# EAGLE board RobotArm5 (EAGLE 4.16)
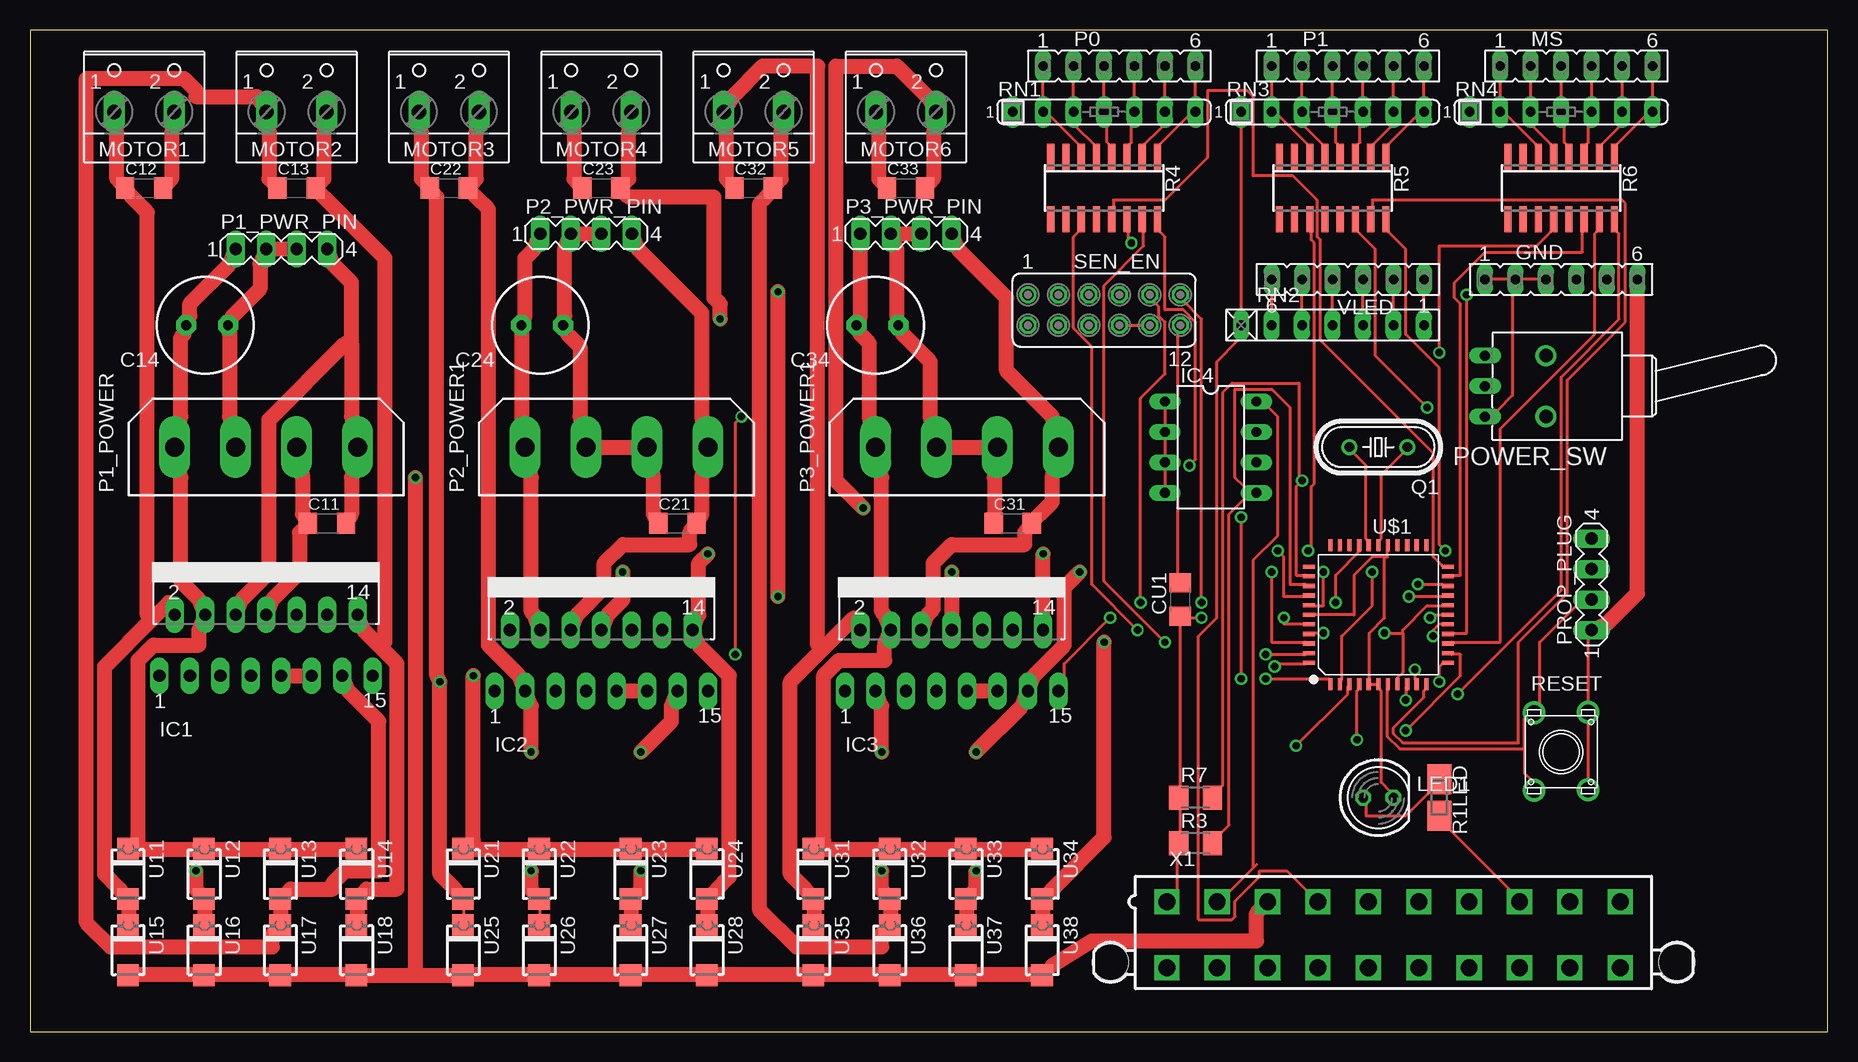
[diagram p0: board, top side]
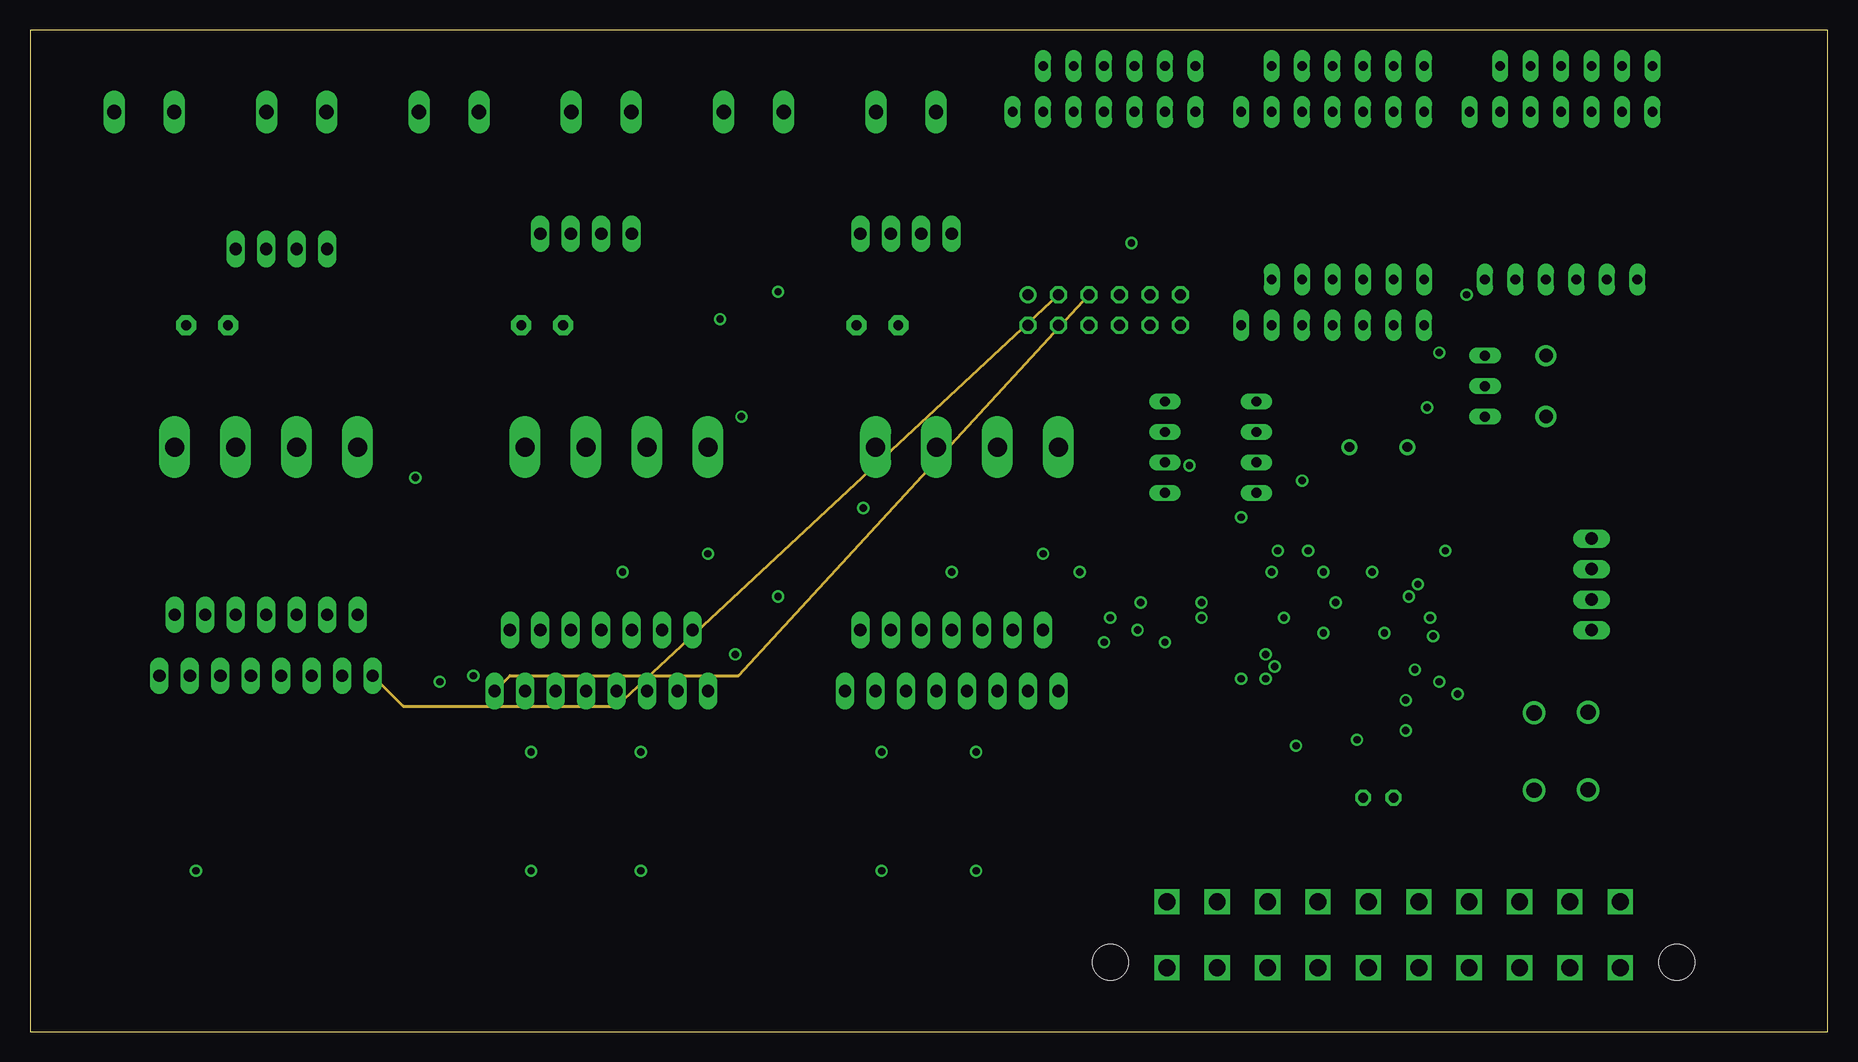
[diagram p1: board, inner layer Route2]
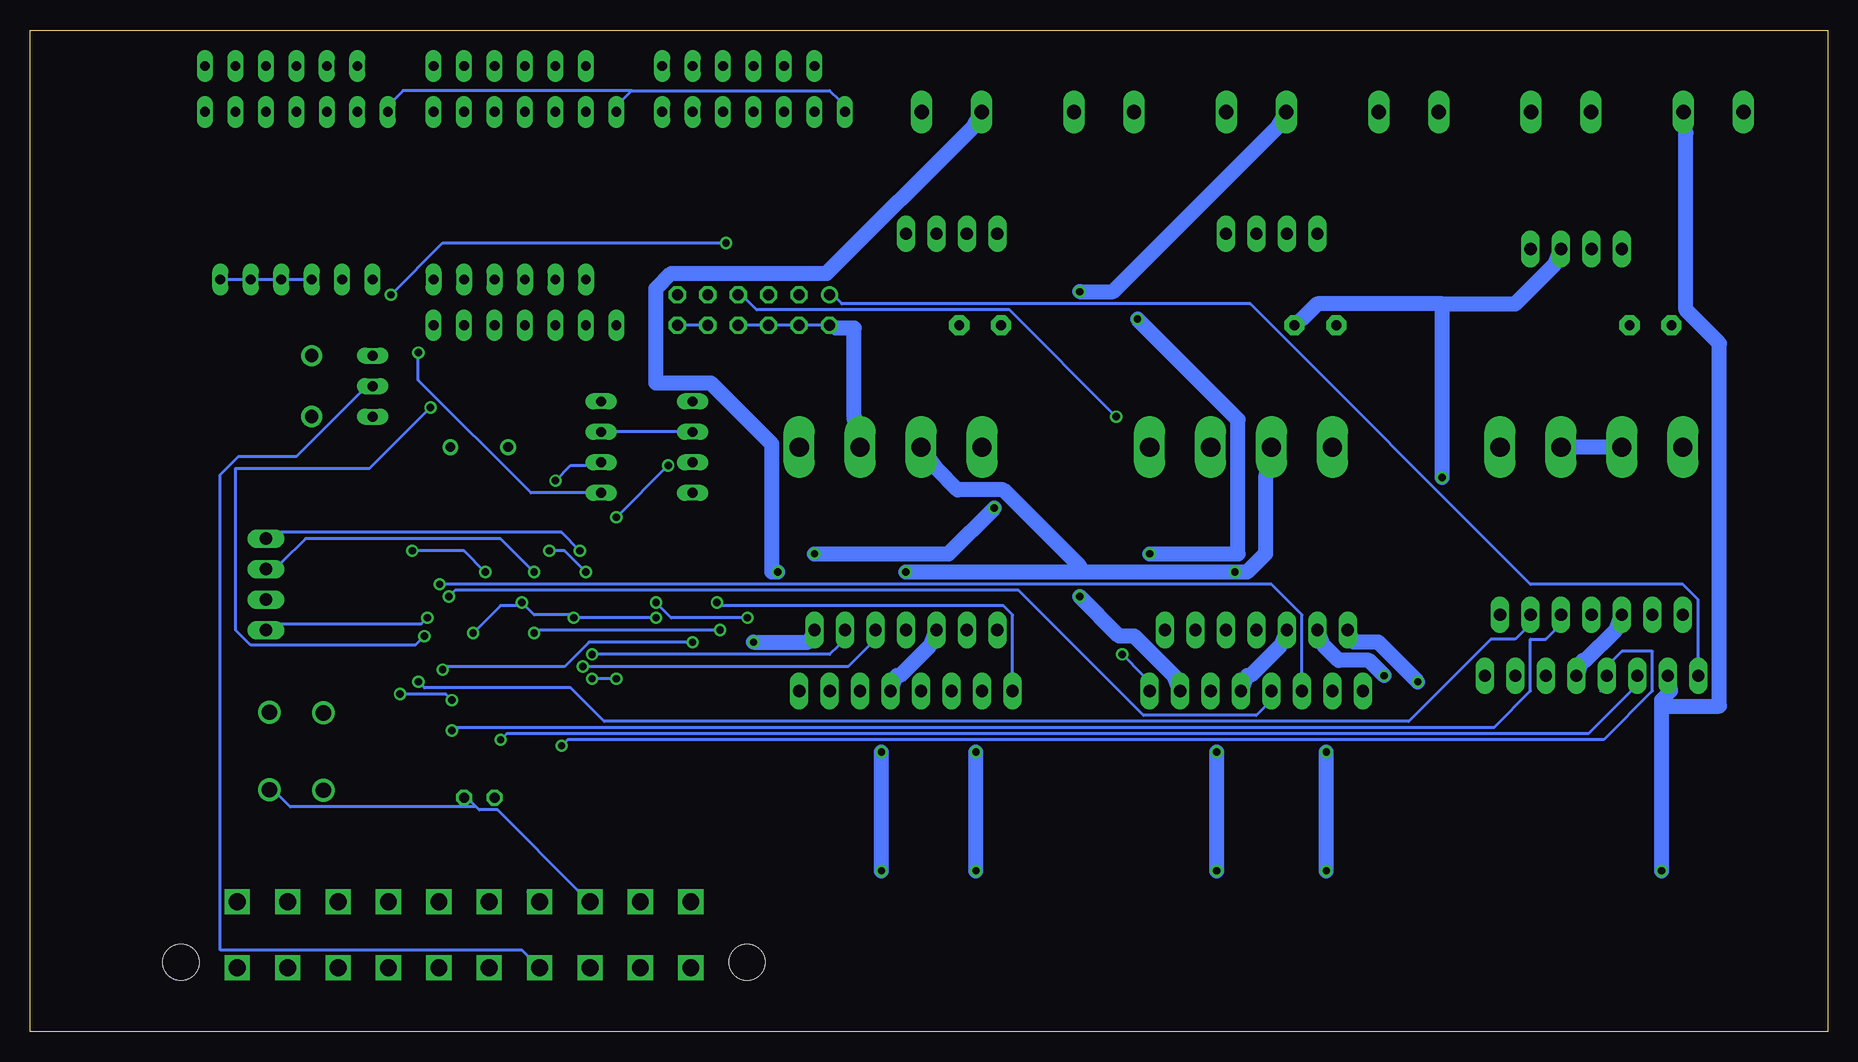
[diagram p2: board, bottom side, seen from below]

Size 149.84 x 83.49 mm. Coordinates in mm from the lower left corner, seen from the top.
Outline: 0,0 149.84,0 149.84,83.49 0,83.49 0,0
Copper layers (1*16): Top 0.035mm / dielectric 1.5mm / Bottom 0.035mm
Design rules "default": minimum track width 50mil, minimum drill 24mil, track to track 8mil, track to pad 8mil, pad to pad 8mil, via to via 8mil, smd to smd 8mil, copper to edge 40mil, drill to drill 8mil, minimum pad ring 10mil, minimum via ring 8mil, stop-mask expansion 4mil, vias tented up to drill 0mil, thermal gap 10mil

## Footprints (pad centres in the part's own frame; a part is rotated, then mirrored left to right if it is on the bottom)
1206 = smd 1.524 x 1.778: P$1 -1.587,0; P$2 1.587,0
ENP-035-080 = drill 0.813 pad 1.676 octagon: 1 -1.905,0; 2 1.587,0
C1206 = smd 1.6 x 1.8: 1 -1.4,0; 2 1.4,0
FE06 = drill 0.813 long: 1 -6.35,0; 2 -3.81,0; 3 -1.27,0; 4 1.27,0; 5 3.81,0; 6 6.35,0
MULTIWATT-15 = drill 1.016 long: 1 -8.89,-7.62; 2 -7.62,-2.54; 3 -6.35,-7.62; 4 -5.08,-2.54; 5 -3.81,-7.62; 6 -2.54,-2.54; 7 -1.27,-7.62; 8 0,-2.54; 9 1.27,-7.62; 10 2.54,-2.54; 11 3.81,-7.62; 12 5.08,-2.54; 13 6.35,-7.62; 14 7.62,-2.54; 15 8.89,-7.62
DIL08 = drill 0.813 long: 1 -3.81,-3.81; 2 -1.27,-3.81; 3 1.27,-3.81; 4 3.81,-3.81; 5 3.81,3.81; 6 1.27,3.81; 7 -1.27,3.81; 8 -3.81,3.81
LED5MM = drill 0.813 octagon: A -1.27,0; K 1.27,0
W237-102 = drill 1.194 long: 1 -2.5,-1.27; 2 2.5,-1.27
9090-4V = drill 1.6 pad 2.6 long: 1 -7.62,0; 2 -2.54,0; 3 2.54,0; 4 7.62,0
MA04-1 = drill 1.016 long: 1 -3.81,0; 2 -1.27,0; 3 1.27,0; 4 3.81,0
9070-1W = drill 0.813 long: 1 5.08,-2.54; 2 5.08,0; 3 5.08,2.54 | drill 1.118 pad 1.778 round: B 0,-2.54; B1 0,2.54
HC49/S = drill 0.813 round: 1 -2.413,0; 2 2.413,0
SMK = smd 2.5 x 2: 1 1.524,0; 2 -1.524,0
M1206 = smd 1.6 x 2: 1 -1.4,0; 2 1.4,0
SO16 = smd 0.6 x 2.2: 1 -4.445,-2.6; 2 -3.175,-2.6; 3 -1.905,-2.6; 4 -0.635,-2.6; 5 0.635,-2.6; 6 1.905,-2.6; 7 3.175,-2.6; 8 4.445,-2.6; 9 4.445,2.6; 10 3.175,2.6; 11 1.905,2.6; 12 0.635,2.6; 13 -0.635,2.6; 14 -1.905,2.6; 15 -3.175,2.6; 16 -4.445,2.6
FSMCD = drill 1.27 round: P$1 -2.25,3.25; P$2 -2.25,-3.2; P$3 2.25,3.3; P$4 2.25,-3.15
SIL7 = drill 0.813 long: 1 -7.62,0; 2 -5.08,0; 3 -2.54,0; 4 0,0; 5 2.54,0; 6 5.08,0; 7 7.62,0
RN-7 = drill 0.813 long: 1 -7.62,0; 2 -5.08,0; 3 -2.54,0; 4 0,0; 5 2.54,0; 6 5.08,0; 7 7.62,0
FE06-2 = drill 0.914 round: 1 -6.35,1.27 | drill 0.914 octagon: 2 -6.35,-1.27; 3 -3.81,1.27; 4 -3.81,-1.27; 5 -1.27,1.27; 6 -1.27,-1.27; 7 1.27,1.27; 8 1.27,-1.27; 9 3.81,1.27; 10 3.81,-1.27; 11 6.35,1.27; 12 6.35,-1.27
SMA = smd 1.8 x 1.8: 1 -2.1,-0.1; 2 2.1,-0.1
LQFP-44 = smd 0.35 x 1: 1 -4,-5.8; 2 -3.2,-5.8; 3 -2.4,-5.8; 4 -1.6,-5.8; 5 -0.8,-5.8; 6 0,-5.8; 7 0.8,-5.8; 8 1.6,-5.8; 9 2.4,-5.8; 10 3.2,-5.8; 11 4,-5.8; 23 4,5.8; 24 3.2,5.8; 25 2.4,5.8; 26 1.6,5.8; 27 0.8,5.8; 28 0,5.8; 29 -0.8,5.8; 30 -1.6,5.8; 31 -2.4,5.8; 32 -3.2,5.8; 33 -4,5.8 | smd 1 x 0.35: 12 5.8,-4; 13 5.8,-3.2; 14 5.8,-2.4; 15 5.8,-1.6; 16 5.8,-0.8; 17 5.8,0; 18 5.8,0.8; 19 5.8,1.6; 20 5.8,2.4; 21 5.8,3.2; 22 5.8,4; 34 -5.8,4; 35 -5.8,3.2; 36 -5.8,2.4; 37 -5.8,1.6; 38 -5.8,0.8; 39 -5.8,0; 40 -5.8,-0.8; 41 -5.8,-1.6; 42 -5.8,-2.4; 43 -5.8,-3.2; 44 -5.8,-4
5566-20 = drill 1.4 square: 1 18.9,-2.75; 2 14.7,-2.75; 3 10.5,-2.75; 4 6.3,-2.75; 5 2.1,-2.75; 6 -2.1,-2.75; 7 -6.3,-2.75; 8 -10.5,-2.75; 9 -14.7,-2.75; 10 -18.9,-2.75; 11 18.9,2.75; 12 14.7,2.75; 13 10.5,2.75; 14 6.3,2.75; 15 2.1,2.75; 16 -2.1,2.75; 17 -6.3,2.75; 18 -10.5,2.75; 19 -14.7,2.75; 20 -18.9,2.75 | hole 3: 23.6,2.29; -23.6,2.29

## Placement (x,y rotation side)
C11  .1uf  [1206]  24.76,42.38 0 top
C12  .1uf  [1206]  9.52,70.32 0 top
C13  .1uf  [1206]  22.22,70.32 0 top
C14  1000uf  [ENP-035-080]  14.6,58.89 180 top
C21  .1uf  [1206]  53.97,42.38 0 top
C22  .1uf  [1206]  34.92,70.32 0 top
C23  .1uf  [1206]  47.62,70.32 0 top
C24  1000uf  [ENP-035-080]  42.54,58.89 180 top
C31  .1uf  [1206]  81.91,42.38 0 top
C32  .1uf  [1206]  60.32,70.32 0 top
C33  .1uf  [1206]  73.02,70.32 0 top
C34  1000uf  [ENP-035-080]  70.48,58.89 180 top
CU1  1uf  [C1206]  95.88,36.03 90 top
GND  [FE06]  127.63,62.7 0 top
IC1  L298  [MULTIWATT-15]  19.68,37.3 0 top
IC2  L298  [MULTIWATT-15]  47.62,36.03 0 top
IC3  L298  [MULTIWATT-15]  76.83,36.03 0 top
IC4  AT24CP  [DIL08]  98.42,48.73 270 top
LED1  [LED5MM]  112.39,19.52 0 top
MOTOR1  [W237-102]  9.52,77.94 0 top
MOTOR2  [W237-102]  22.22,77.94 0 top
MOTOR3  [W237-102]  34.92,77.94 0 top
MOTOR4  [W237-102]  47.62,77.94 0 top
MOTOR5  [W237-102]  60.32,77.94 0 top
MOTOR6  [W237-102]  73.02,77.94 0 top
MS  [FE06]  128.9,80.48 0 top
P0  [FE06]  90.8,80.48 0 top
P1  [FE06]  109.85,80.48 0 top
P1_POWER  9090-4V  [9090-4V]  19.68,48.73 0 top
P1_PWR_PIN  [MA04-1]  20.95,65.24 0 top
P2_POWER1  9090-4V  [9090-4V]  48.89,48.73 0 top
P2_PWR_PIN  [MA04-1]  46.35,66.51 0 top
P3_POWER1  9090-4V  [9090-4V]  78.1,48.73 0 top
P3_PWR_PIN  [MA04-1]  73.02,66.51 0 top
POWER_SW  [9070-1W]  126.36,53.81 180 top
PROP_PLUG  [MA04-1]  130.17,37.3 90 top
Q1  [HC49/S]  112.39,48.73 180 top
R1LED  330ohm  [SMK]  117.47,19.52 270 top
R3  10K  [M1206]  97.15,15.71 0 top
R4  270ohm  [SO16]  89.53,70.32 180 top
R5  270ohm  [SO16]  108.58,70.32 180 top
R6  270ohm  [SO16]  127.63,70.32 180 top
R7  10K  [M1206]  97.15,19.52 0 top
RESET  FSMCD  [FSMCD]  127.63,23.33 0 top
RN1  10K  [SIL7]  89.53,76.67 0 top
RN2  [RN-7]  108.58,58.89 0 top
RN3  10K  [SIL7]  108.58,76.67 0 top
RN4  10K  [SIL7]  127.63,76.67 0 top
SEN_EN  [FE06-2]  89.53,60.16 0 top
U11  SSA34  [SMA]  8.25,13.17 270 top
U12  SSA34  [SMA]  14.6,13.17 270 top
U13  SSA34  [SMA]  20.95,13.17 270 top
U14  SSA34  [SMA]  27.3,13.17 270 top
U15  SSA34  [SMA]  8.25,6.82 270 top
U16  SSA34  [SMA]  14.6,6.82 270 top
U17  SSA34  [SMA]  20.95,6.82 270 top
U18  SSA34  [SMA]  27.3,6.82 270 top
U21  SSA34  [SMA]  36.19,13.17 270 top
U22  SSA34  [SMA]  42.54,13.17 270 top
U23  SSA34  [SMA]  50.16,13.17 270 top
U24  SSA34  [SMA]  56.51,13.17 270 top
U25  SSA34  [SMA]  36.19,6.82 270 top
U26  SSA34  [SMA]  42.54,6.82 270 top
U27  SSA34  [SMA]  50.16,6.82 270 top
U28  SSA34  [SMA]  56.51,6.82 270 top
U31  SSA34  [SMA]  65.4,13.17 270 top
U32  SSA34  [SMA]  71.75,13.17 270 top
U33  SSA34  [SMA]  78.1,13.17 270 top
U34  SSA34  [SMA]  84.45,13.17 270 top
U35  SSA34  [SMA]  65.4,6.82 270 top
U36  SSA34  [SMA]  71.75,6.82 270 top
U37  SSA34  [SMA]  78.1,6.82 270 top
U38  SSA34  [SMA]  84.45,6.82 270 top
U$1  P8X32A  [LQFP-44]  112.39,34.76 0 top
VLED  [FE06]  109.85,62.7 180 top
X1  5566-20  [5566-20]  113.66,8.09 180 top

## Library data of the parts
C11-C14 C21-C24 C31-C34 = zz-cap-master
CU1 = zz-rcl
GND MS P0 P1 SEN_EN VLED = con-lsta
IC1-IC3 = zz-st-microelectronics
IC4 = atmel
LED1 = led
MOTOR1-MOTOR6 = con-wago-500
P1_POWER P2_POWER1 P3_POWER1 = con-thomas-betts
P1_PWR_PIN P2_PWR_PIN P3_PWR_PIN PROP_PLUG = con-lstb
POWER_SW = switch
Q1 = crystal
R1LED = resistor-shunt
R3 R7 = rcl
R4-R6 = resistor-bourns
RESET = zz-switch-misc
RN1 RN3 RN4 = resistor-sil
RN2 = resistor-net
U11-U18 U21-U28 U31-U38 = diode-20CJQ030
U$1 = propeller
X1 = con-molex

## Nets
3.3VCC1: CU1.1 R3.1 R7.1 U$1.8 U$1.18 U$1.30 U$1.40 X1.1
5VCC: RN1.1 RN2.1 RN3.1 RN4.1 X1.4
CTL1: IC1.7 U$1.3
CTL2: IC1.12 U$1.12
CTL3: IC2.7 U$1.19
CTL4: IC2.12
CTL5: IC3.7
CTL6: IC3.12 U$1.43
GND: C11.P$1 C14.1 C21.P$1 C24.1 C31.P$1 C34.1 CU1.2 GND.1 GND.2 GND.3 GND.4 GND.5 GND.6 IC1.8 IC2.8 IC3.8 IC4.1 IC4.2 IC4.3 IC4.4 IC4.7 LED1.K P1_POWER.2 P1_POWER.3 P1_PWR_PIN.2 P1_PWR_PIN.3 P2_POWER1.2 P2_POWER1.3 P2_PWR_PIN.2 P2_PWR_PIN.3 P3_POWER1.2 P3_POWER1.3 P3_PWR_PIN.2 P3_PWR_PIN.3 POWER_SW.3 PROP_PLUG.1 RESET.P$3 RESET.P$4 SEN_EN.2 SEN_EN.4 SEN_EN.6 SEN_EN.8 SEN_EN.10 SEN_EN.12 U15.2 U16.2 U17.2 U18.2 U25.2 U26.2 U27.2 U28.2 U35.2 U36.2 U37.2 U38.2 U$1.5 U$1.6 U$1.17 U$1.27 U$1.39 X1.3
M5GND: C13.P$2 IC1.14 MOTOR2.2 U14.2 U18.1
M5GND1: C23.P$2 IC2.14 MOTOR4.2 U24.2 U28.1
M5GND2: C33.P$2 IC3.14 MOTOR6.2 U34.2 U38.1
M5VCC: C13.P$1 IC1.13 MOTOR2.1 U13.2 U17.1
M5VCC1: C23.P$1 IC2.13 MOTOR4.1 U23.2 U27.1
M5VCC2: C33.P$1 IC3.13 MOTOR6.1 U33.2 U37.1
M6GND: C12.P$2 IC1.3 MOTOR1.2 U12.2 U16.1
M6GND1: C22.P$2 IC2.3 MOTOR3.2 U22.2 U26.1
M6GND2: C32.P$2 IC3.3 MOTOR5.2 U32.2 U36.1
M6VCC: C12.P$1 IC1.2 MOTOR1.1 U11.2 U15.1
M6VCC1: C22.P$1 IC2.2 MOTOR3.1 U21.2 U25.1
M6VCC2: C32.P$1 IC3.2 MOTOR5.1 U31.2 U35.1
N$1: RN2.2 VLED.6
N$2: RN2.3 VLED.5
N$3: POWER_SW.2 X1.14
N$4: R1LED.1 X1.8
N$5: RN2.4 VLED.4
N$6: LED1.A R1LED.2
N$7: P1.1 R5.6 RN3.2
N$8: RN2.5 VLED.3
N$9: RN2.6 VLED.2
N$10: RN2.7 VLED.1
N$11: P1.2 R5.5 RN3.3
N$12: P0.3 R4.4 RN1.4
N$13: Q1.2 U$1.29
N$14: Q1.1 U$1.28
N$15: P0.4 R4.3 RN1.5
N$16: P0.5 R4.2 RN1.6
N$17: P0.6 R4.1 RN1.7
N$18: P1.3 R5.4 RN3.4
N$19: P1.4 R5.3 RN3.5
N$20: P1.5 R5.2 RN3.6
N$21: P1.6 R5.1 RN3.7
N$22: MS.6 R6.1 RN4.7
N$23: MS.5 R6.2 RN4.6
N$24: MS.4 R6.3 RN4.5
N$25: MS.3 R6.4 RN4.4
N$26: MS.2 R6.5 RN4.3
N$27: MS.1 R6.6 RN4.2
NC1: R6.11
P0: R4.11 U$1.41
P0_1: P0.1 R4.6 RN1.2
P0_2: P0.2 R4.5 RN1.3
P1: R5.11 U$1.42
P1_5V: C11.P$2 IC1.6 IC1.9 IC1.11 P1_POWER.4 P1_PWR_PIN.4
P1_12V: C14.2 IC1.4 P1_POWER.1 P1_PWR_PIN.1 U11.1 U12.1 U13.1 U14.1
P2_5V: C21.P$2 IC2.6 IC2.9 IC2.11 P2_POWER1.4 P2_PWR_PIN.4
P2_12V: C24.2 IC2.4 P2_POWER1.1 P2_PWR_PIN.1 U21.1 U22.1 U23.1 U24.1
P3_5V: C31.P$2 IC3.6 IC3.9 IC3.11 P3_POWER1.4 P3_PWR_PIN.4
P3_12V: C34.2 IC3.4 P3_POWER1.1 P3_PWR_PIN.1 U31.1 U32.1 U33.1 U34.1
P4: R4.16 U$1.1
P5: R5.16 U$1.2
P8: R6.16 U$1.9
P9: R4.15 U$1.10
P10: R5.15 U$1.11
P13: R6.15 U$1.14
P14: R4.14 U$1.15
P15: R5.14 U$1.16
P18: R6.14 U$1.21
P19: R4.13 U$1.22
P20: R5.13
P23: R6.13
P24: R4.12
P25: R5.12
P28: IC4.6 R7.2 U$1.35
P29: IC4.5 R3.2 R6.12 U$1.36
P30: PROP_PLUG.4 U$1.37
P31: PROP_PLUG.3 U$1.38
PWM1: IC1.5 U$1.4
PWM2: IC1.10 U$1.13
PWM3: IC2.5 U$1.20
PWM4: IC2.10
PWM5: IC3.5
PWM6: IC3.10 U$1.44
RES: PROP_PLUG.2 RESET.P$1 RESET.P$2 U$1.7
SEN_1: IC1.1 SEN_EN.1
SEN_2: IC1.15 SEN_EN.3
SEN_3: IC2.1 SEN_EN.5
SEN_4: IC2.15 SEN_EN.7
SEN_5: IC3.1 SEN_EN.9
SEN_6: IC3.15 SEN_EN.11
VCC3.3V2: IC4.8 X1.2

## Tracks (layer width: path | path; a pad name or v marks a point on that pad's centre or on a via)
3.3VCC1  (via drill 0.61)
  Top 0.254: X1.1 95.63,11.65 95.63,14.95 R3.1 95.88,16.47 95.88,18.76 R7.1 95.88,20.28 CU1.1 96.64,34.51 v97.66,34.51 | 114.42,33.24 114.42,33.49 116.45,35.52 117.72,35.52 U$1.18 | 114.42,33.24 114.42,29.93 113.91,29.43 U$1.8 | v104.52,34.51 104.52,34 106.29,34 U$1.40 | v108.83,35.78 108.83,38.06 110.87,40.09 U$1.30 | v112.9,33.24 114.42,33.24
  Bottom 0.254: v97.66,34.51 v104.52,34.51 104.77,34.76 107.82,34.76 v108.83,35.78 109.09,35.52 110.61,35.52 v112.9,33.24
5VCC
  Top 0.254: RN3.1 RN2.1 100.71,57.62 98.93,55.84 98.93,34.51 97.4,32.98 97.4,9.36 100.2,9.36 100.45,9.61 100.45,10.88 102.48,12.92 102.48,13.42 104.77,13.42 106.55,11.65 X1.4
  Bottom 0.254: 99.69,78.45 83.18,78.45 82.42,77.69 RN1.1 | 99.69,78.45 100.45,77.69 RN3.1 | 99.69,78.45 118.74,78.45 119.5,77.69 RN4.1 | X1.4 108.33,11.65
CTL1  (via drill 0.61)
  Top 0.254: v105.53,23.84 109.85,28.16 109.85,28.66 U$1.3
  Bottom 0.254: 18.92,28.41 IC1.7 17.9,30.95 17.14,31.71 14.6,31.71 14.6,28.41 18.66,24.35 105.02,24.35 v105.53,23.84
CTL2  (via drill 0.61)
  Top 0.254: v117.47,29.17 117.47,30.44 117.72,30.7 U$1.12
  Bottom 0.254: v117.47,29.17 116.96,28.66 104.77,28.66 101.98,25.87 34.92,25.87 28.06,32.73 26.03,32.73 25.27,33.49 IC1.12
CTL3  (via drill 0.61)
  Top 0.254: v114.93,36.28 117.72,36.28 U$1.19
  Bottom 0.254: v114.93,36.28 114.42,36.79 67.43,36.79 57.02,26.38 47.62,26.38 46.86,27.14 IC2.7
CTL6  (via drill 0.61)
  Top 0.254: v102.99,31.46 106.29,31.46 U$1.43
  Bottom 0.254: v102.99,31.46 83.18,31.46 82.42,32.22 IC3.12
GND  (via drill 0.61)
  Top 0.254: U35.2 66.16,4.79 | 70.99,4.79 U36.2 72.51,4.79 | 78.86,4.79 U37.2 77.34,4.79 | 83.69,4.79 U38.2 85.21,5.55 | U25.2 36.95,4.79 | 41.78,4.79 U26.2 43.3,4.79 | 50.92,4.79 U27.2 49.4,4.79 | 55.75,4.79 U28.2 | X1.3 104.01,11.65 | U15.2 9.01,4.79 | 13.84,4.79 U16.2 15.36,4.79 | 21.71,4.79 U17.2 20.19,4.79 | 26.54,4.79 U18.2 26.54,5.55 | GND.2 GND.1 | GND.3 GND.2 | CU1.2 95.63,38.06 95.63,44.41 IC4.4 IC4.3 IC4.2 IC4.1 95.63,53.05 95.63,58.38 SEN_EN.12 | SEN_EN.8 SEN_EN.10 | RESET.P$4 129.92,21.04 129.92,25.87 RESET.P$3 129.92,27.39 129.92,32.98 PROP_PLUG.1 | v116.71,34.51 116.71,34.76 U$1.17 | POWER_SW.3 122.3,51.78 123.57,53.05 123.57,61.43 GND.2 | 112.9,39.59 113.15,39.59 113.15,40.09 U$1.27 | 112.9,39.59 111.88,39.59 110.36,38.06 110.36,34.76 U$1.39 | LED1.K 113.41,20.03 112.64,20.79 112.64,28.41 112.39,28.66 U$1.6 112.39,28.92 111.63,28.92 U$1.5 111.63,29.43 111.63,33.24 112.9,34.51 112.9,39.59
  Top 0.406: U25.2 36.19,4.72 36.19,4.28
  Top 1.27: 66.16,4.79 70.99,4.79 | 78.86,4.79 83.69,4.79 | 72.51,4.79 77.34,4.79 | 36.95,4.79 41.78,4.79 | 50.92,4.79 55.75,4.79 | 43.3,4.79 49.4,4.79 | 85.21,5.55 88.51,7.58 102.23,7.58 102.23,9.87 X1.3 | 9.01,4.79 13.84,4.79 | 21.71,4.79 26.54,4.79 | 15.36,4.79 20.19,4.79 | U18.2 32.13,4.72 | 32.13,4.72 36.19,4.72 | P1_PWR_PIN.3 P1_PWR_PIN.2 19.17,63.97 19.17,61.94 16.89,59.65 C14.1 16.63,58.13 16.63,51.27 P1_POWER.2 | P1_POWER.3 22.73,46.19 22.73,43.14 C11.P$1 22.47,41.62 22.47,38.32 20.19,36.03 IC1.8 | P3_PWR_PIN.3 P3_PWR_PIN.2 72.26,65.24 72.26,59.65 C34.1 72.77,58.13 75.05,55.84 75.05,51.27 P3_POWER1.2 P3_POWER1.3 80.39,46.19 80.39,43.14 C31.P$1 | P2_PWR_PIN.3 P2_PWR_PIN.2 44.57,65.24 44.57,59.65 C24.1 44.83,58.13 45.84,57.11 45.84,51.27 P2_POWER1.2 P2_POWER1.3 51.94,46.19 51.94,43.14 C21.P$1 | v49.4,38.32 49.4,36.03 48.13,34.76 IC2.8 | v76.83,38.32 IC3.8 | GND.6 133.98,36.54 131.44,34 PROP_PLUG.1 | U35.2 64.64,4.79 57.27,4.79 U28.2 | 32.13,4.72 v32.13,46.19
  Bottom 0.254: GND.6 GND.5 GND.4 GND.3 | IC4.2 IC4.7 | SEN_EN.10 SEN_EN.12 | SEN_EN.8 SEN_EN.6 SEN_EN.4 SEN_EN.2 | v116.71,34.51 117.22,34 128.9,34 PROP_PLUG.1 | 112.64,18.76 113.15,19.27 LED1.K | 112.64,18.76 112.39,18.5 110.87,18.5 104.01,11.65 X1.3 | 112.64,18.76 128.14,18.76 129.15,19.77 RESET.P$4
  Bottom 1.27: P1_POWER.2 P1_POWER.3 | P3_POWER1.3 81.15,51.27 81.15,58.64 82.67,58.64 SEN_EN.2 | P2_POWER1.2 46.86,46.19 46.86,39.84 48.38,38.32 v49.4,38.32 62.35,38.32 | 62.35,38.32 v76.83,38.32 | P3_POWER1.2 74.29,46.95 72.51,45.17 68.7,45.17 62.35,38.82 62.35,38.32 | 32.13,60.67 42.54,60.67 43.81,59.4 C24.1 | 32.13,60.67 26.03,60.67 22.73,63.97 P1_PWR_PIN.3 | v32.13,46.19 32.13,60.67
M5GND
  Top 0.254: U18.1 27.3,9.61 | 27.3,10.38 U14.2
  Top 1.27: 27.3,9.61 27.3,10.38 | MOTOR2.2 24.51,74.89 24.51,71.08 C13.P$2 24.51,69.56 29.59,64.48 29.59,32.47 29.2,32.09 | 29.2,32.09 27.81,33.49 IC1.14 | 29.2,32.09 30.6,30.7 30.6,11.9 28.06,11.9 U14.2
M5GND1  (via drill 0.61)
  Top 0.254: U28.1 56.51,9.61 | 56.51,10.38 U24.2
  Top 1.27: 56.51,9.61 56.51,10.38 | MOTOR4.2 49.91,74.89 49.91,71.08 C23.P$2 49.91,69.56 57.02,69.56 57.02,61.18 57.53,60.67 v57.53,59.4 | U24.2 57.27,11.9 58.29,12.92 58.29,29.68 55.75,32.22 IC2.14 55.75,34.76 55.75,39.08 v56.51,39.84
  Bottom 1.27: v57.53,59.4 49.14,51.02 49.14,39.84 v56.51,39.84
M5GND2  (via drill 0.61)
  Top 0.254: U38.1 84.45,9.61 | 84.45,10.38 U34.2
  Top 1.27: 84.45,9.61 84.45,10.38 | C33.P$2 75.31,71.08 75.31,74.89 MOTOR6.2 74.8,77.94 72.26,80.48 67.18,80.48 67.18,45.94 v69.46,43.65 | v89.53,32.47 89.53,16.22 85.21,11.9 U34.2 | IC3.14 v84.45,39.84
  Bottom 1.27: v89.53,32.47 84.96,32.47 IC3.14 | v69.46,43.65 73.27,39.84 v84.45,39.84
M5VCC
  Top 0.254: U17.1 20.95,9.61 | 20.95,10.38 U13.2
  Top 1.27: 20.95,9.61 20.95,10.38 | C13.P$1 19.93,71.08 19.93,74.89 MOTOR2.1 18.92,77.94 13.84,77.94 13.84,78.45 12.82,79.46 4.69,79.46 4.69,9.11 6.73,7.07 20.19,7.07 20.19,8.09 U17.1 | U13.2 21.71,11.9 25.27,11.9 25.27,12.41 26.28,13.42 29.08,13.42 29.08,25.87 26.54,28.41 IC1.13
M5VCC1  (via drill 0.61)
  Top 0.254: U27.1 50.16,9.61 | 50.16,10.38 U23.2
  Top 1.27: 50.16,9.61 50.16,10.38 | C23.P$1 45.33,71.08 45.33,74.89 MOTOR4.1 | v50.92,13.42 50.92,11.9 U23.2 | v50.92,23.33 53.46,25.87 53.46,27.14 IC2.13 | v62.35,36.28 v62.35,61.68
  Bottom 1.27: v50.92,13.42 v50.92,23.33 | v62.35,61.68 59.56,61.68 45.84,75.4 MOTOR4.1 | v62.35,36.28 59.05,32.98 57.78,32.98 54.48,29.68 IC2.13
M5VCC2  (via drill 0.61)
  Top 0.254: U37.1 78.1,9.61 | 78.1,10.38 U33.2
  Top 1.27: 78.1,9.61 78.1,10.38 | C33.P$1 70.73,71.08 70.73,74.89 MOTOR6.1 | v78.86,13.42 78.86,11.9 U33.2 | v78.86,23.33 82.67,27.14 IC3.13 83.69,29.68 86.23,32.22 86.23,37.05 v87.5,38.32
  Bottom 1.27: v78.86,13.42 v78.86,23.33 | v87.5,38.32 88.01,38.32 88.01,48.98 93.09,54.06 97.66,54.06 97.66,61.94 96.39,63.21 83.43,63.21 71.24,75.4 MOTOR6.1
M6GND  (via drill 0.61)
  Top 0.254: U16.1 14.6,9.61 | 14.6,10.38 U12.2
  Top 1.27: 14.6,9.61 14.6,10.38 | C12.P$2 11.81,71.08 11.81,74.89 MOTOR1.2 | v13.84,13.42 13.84,11.9 U12.2
  Bottom 1.27: 13.84,27.14 13.84,27.65 13.08,28.41 IC1.3 | v13.84,13.42 13.84,27.14 | MOTOR1.2 11.81,74.89 11.81,60.16 9.01,57.37 9.01,27.14 13.84,27.14
M6GND1  (via drill 0.61)
  Top 0.254: U26.1 42.54,9.61 42.54,10.38 U22.2
  Top 1.27: MOTOR3.2 37.21,74.89 37.21,71.08 C22.P$2 37.21,69.56 38.22,68.54 38.22,32.22 40.76,29.68 IC2.3 41.78,27.14 v41.78,23.33 | v41.78,13.42 41.78,11.9 U22.2
  Bottom 1.27: v41.78,13.42 v41.78,23.33
M6GND2  (via drill 0.61)
  Top 0.254: U36.1 71.75,9.61 | 71.75,10.38 U32.2
  Top 1.27: 71.75,9.61 71.75,10.38 | MOTOR5.2 62.61,74.89 62.61,71.08 C32.P$2 61.34,69.56 60.83,69.05 60.83,10.12 63.88,7.07 70.99,7.07 70.99,8.09 U36.1 | v70.99,13.42 70.99,11.9 U32.2 | v70.99,23.33 70.99,27.14 IC3.3
  Bottom 1.27: v70.99,13.42 v70.99,23.33
M6VCC
  Top 0.254: U15.1 8.25,9.61 | 8.25,10.38 U11.2
  Top 1.27: 8.25,9.61 8.25,10.38 | MOTOR1.1 7.23,74.89 7.23,71.08 C12.P$1 8.5,69.56 9.77,68.29 9.77,34.76 10.16,34.38 | 10.16,34.38 11.55,35.78 IC1.2 | 10.16,34.38 6.22,30.44 6.22,13.17 7.49,11.9 U11.2
M6VCC1  (via drill 0.61)
  Top 0.254: U25.1 36.19,9.61 36.19,10.38 U21.2
  Top 1.27: MOTOR3.1 32.63,74.89 32.63,71.08 C22.P$1 33.9,69.56 33.9,29.68 v34.16,29.17 34.16,13.17 35.43,11.9 U21.2
  Bottom 1.27: v34.16,29.17 37.46,32.47 39.49,32.47 IC2.2
M6VCC2
  Top 0.254: U35.1 65.4,9.61 | 65.4,10.38 U31.2
  Top 1.27: 65.4,9.61 65.4,10.38 | C32.P$1 58.03,71.08 58.03,74.89 MOTOR5.1 58.54,77.94 61.08,80.48 65.65,80.48 65.65,32.22 66.03,31.84 | 66.03,31.84 68.7,34.51 IC3.2 | 66.03,31.84 63.37,29.17 63.37,13.17 64.64,11.9 U31.2
N$1
  Top 0.254: RN2.2 VLED.6
N$2
  Top 0.254: RN2.3 VLED.5
N$3
  Bottom 0.254: POWER_SW.2 122.3,53.3 127.63,47.97 132.46,47.97 133.98,46.44 133.98,6.82 108.83,6.82 108.33,6.31 X1.14
N$4
  Top 0.254: R1LED.1 118.23,16.98 123.31,11.9 123.31,11.65 X1.8
N$5
  Top 0.254: RN2.4 VLED.4
N$6
  Top 0.254: R1LED.2 116.71,20.03 114.68,18 111.37,18 111.37,19.01 LED1.A
N$7
  Top 0.254: R5.6 106.55,73.88 104.01,76.42 RN3.2 P1.1
N$8
  Top 0.254: RN2.5 VLED.3
N$9
  Top 0.254: RN2.6 VLED.2
N$10
  Top 0.254: RN2.7 VLED.1
N$11
  Top 0.254: R5.5 107.82,73.88 106.29,75.4 RN3.3 P1.2
N$12
  Top 0.254: R4.4 90.04,73.88 89.78,74.13 89.78,75.4 RN1.4 P0.3
N$13
  Top 0.254: U$1.29 111.63,40.86 111.37,41.11 111.37,47.21 110.36,48.22 Q1.2
N$14
  Top 0.254: U$1.28 112.39,40.86 112.64,41.11 112.64,46.44 114.42,48.22 Q1.1
N$15
  Top 0.254: R4.3 91.56,73.88 91.82,74.13 91.82,75.4 RN1.5 P0.4
N$16
  Top 0.254: R4.2 92.83,73.88 94.36,75.4 RN1.6 P0.5
N$17
  Top 0.254: R4.1 94.1,73.88 96.64,76.42 RN1.7 P0.6
N$18
  Top 0.254: R5.4 109.09,73.88 108.83,74.13 108.83,75.4 RN3.4 P1.3
N$19
  Top 0.254: R5.3 110.61,73.88 110.87,74.13 110.87,75.4 RN3.5 P1.4
N$20
  Top 0.254: R5.2 111.88,73.88 113.41,75.4 RN3.6 P1.5
N$21
  Top 0.254: R5.1 113.15,73.88 115.69,76.42 RN3.7 P1.6
N$22
  Top 0.254: R6.1 132.2,73.88 134.74,76.42 RN4.7 MS.6
N$23
  Top 0.254: R6.2 130.93,73.88 132.46,75.4 RN4.6 MS.5
N$24
  Top 0.254: R6.3 129.66,73.88 129.92,74.13 129.92,75.4 RN4.5 MS.4
N$25
  Top 0.254: R6.4 128.14,73.88 127.88,74.13 127.88,75.4 RN4.4 MS.3
N$26
  Top 0.254: R6.5 126.87,73.88 125.34,75.4 RN4.3 MS.2
N$27
  Top 0.254: R6.6 125.6,73.88 123.06,76.42 RN4.2 MS.1
P0  (via drill 0.61)
  Top 0.254: R4.11 87.5,66.76 86.99,66.26 86.99,58.64 88.51,57.11 88.51,37.3 v92.32,33.49 | v107.82,33.24 107.06,33.24 U$1.41
  Bottom 0.254: v107.82,33.24 107.56,33.49 v92.32,33.49
P0_1
  Top 0.254: R4.6 87.5,73.88 84.96,76.42 RN1.2 P0.1
P0_2
  Top 0.254: R4.5 88.77,73.88 87.24,75.4 RN1.3 P0.2
P1  (via drill 0.61)
  Top 0.254: 106.55,66.76 R5.11 106.8,66.76 106.8,66 107.06,65.75 107.06,45.68 106.8,45.43 106.8,40.35 v106.55,40.09 | v103.5,38.32 103.5,32.47 106.29,32.47 U$1.42
  Bottom 0.254: v103.5,38.32 105.28,40.09 v106.55,40.09
P1_5V
  Top 0.254: C11.P$2 25.78,41.62
  Top 1.27: IC1.9 IC1.11 | C11.P$2 26.79,43.14 26.79,46.19 P1_POWER.4 26.79,51.27 26.79,57.37 | 26.79,57.37 26.79,62.45 25.27,63.97 P1_PWR_PIN.4 | IC1.6 17.65,36.03 19.93,38.32 19.93,51.02 26.28,57.37 26.79,57.37
  Bottom 1.27: IC1.6 17.65,33.49 20.19,30.95 20.44,30.95 IC1.9
P1_12V
  Top 0.254: U11.1 9.01,15.2 | 13.84,15.2 U12.1 15.36,15.2 | 21.71,15.2 U13.1 20.19,15.2 | 26.54,15.2 U14.1
  Top 1.27: 9.01,15.2 13.84,15.2 | 21.71,15.2 26.54,15.2 | 15.36,15.2 20.19,15.2 | P1_PWR_PIN.1 16.63,63.97 13.33,60.67 13.33,59.65 C14.2 12.82,58.13 12.57,57.87 12.57,51.27 P1_POWER.1 12.57,46.19 12.57,37.55 14.09,36.03 IC1.4 14.09,33.49 14.09,32.22 10.28,32.22 9.01,30.95 9.01,15.96 U11.1
P2_5V
  Top 1.27: IC2.9 IC2.11 | P2_PWR_PIN.4 50.67,65.24 56,59.91 56,51.27 P2_POWER1.4 56,46.19 56,43.14 C21.P$2 54.99,41.62 54.99,40.6 49.4,40.6 47.87,39.08 47.87,37.05 45.59,34.76 IC2.6
  Bottom 1.27: IC2.6 45.59,32.22 48.13,29.68 48.38,29.68 IC2.9
P2_12V  (via drill 0.61)
  Top 0.254: U21.1 36.95,15.2 | 41.78,15.2 U22.1 | 50.92,15.2 U23.1 49.4,15.2 | 55.75,15.2 U24.1 | U22.1 43.3,15.2 | U22.1 42.54,15.96
  Top 1.27: 36.95,15.2 41.78,15.2 | 50.92,15.2 55.75,15.2 | 43.3,15.2 49.4,15.2 | P2_PWR_PIN.1 42.03,65.24 41.27,64.48 41.27,59.65 C24.2 41.02,58.13 41.02,51.27 P2_POWER1.1 41.78,46.19 41.78,35.01 42.03,34.76 IC2.4 | v36.95,29.68 36.95,15.96 U21.1
  Bottom 1.27: v36.95,29.68 38.22,30.95 40.76,30.95 42.03,32.22 IC2.4
P3_5V
  Top 1.27: IC3.9 IC3.11 | P3_PWR_PIN.4 77.34,65.24 81.4,61.18 81.4,55.08 85.21,51.27 P3_POWER1.4 85.21,46.19 85.21,44.16 84.2,43.14 C31.P$2 82.93,41.62 82.93,40.6 76.83,40.6 75.31,39.08 75.31,35.27 74.8,34.76 IC3.6
  Bottom 1.27: IC3.6 74.8,32.22 77.34,29.68 77.59,29.68 IC3.9
P3_12V
  Top 0.254: U31.1 66.16,15.2 | 70.99,15.2 U32.1 72.51,15.2 | 78.86,15.2 U33.1 77.34,15.2 | 83.69,15.2 U34.1
  Top 1.27: 66.16,15.2 70.99,15.2 | 78.86,15.2 83.69,15.2 | 72.51,15.2 77.34,15.2 | P3_PWR_PIN.1 69.21,59.65 C34.2 69.21,58.13 69.97,57.37 69.97,51.27 P3_POWER1.1 70.99,46.19 70.99,35.01 71.24,34.76 IC3.4 71.24,32.22 71.24,30.95 67.43,30.95 66.16,29.68 66.16,15.96 U31.1
P4  (via drill 0.61)
  Top 0.254: R4.16 94.1,66.76 94.61,66.26 94.61,60.16 96.13,60.16 97.15,59.14 97.15,47.71 v96.64,47.21 | v102.99,29.43 108.33,29.43 U$1.1 | v100.96,29.43 v100.96,42.89
  Bottom 0.254: v100.96,29.43 v102.99,29.43 | v100.96,42.89 v96.64,47.21
P5  (via drill 0.61)
  Top 0.254: R5.16 113.15,66.76 114.68,65.24 114.68,58.13 117.47,55.33 117.47,40.6 v117.98,40.09 | v111.88,38.32 111.88,35.52 109.34,32.98 109.34,29.43 U$1.2
  Bottom 0.254: v111.88,38.32 113.66,40.09 v117.98,40.09
P8  (via drill 0.61)
  Top 0.254: v114.68,27.65 114.68,28.66 U$1.9 | v118.99,28.16 127.63,36.79 127.63,54.57 132.46,59.4 132.46,66.51 132.2,66.76 R6.16
  Bottom 0.254: v114.68,27.65 115.18,28.16 v118.99,28.16
P9  (via drill 0.61)
  Top 0.254: R4.15 92.83,66.76 92.83,65.49 89.53,62.19 89.53,37.55 v94.61,32.47 | v115.44,30.19 115.44,29.43 U$1.10
  Bottom 0.254: v115.44,30.19 115.18,30.44 105.28,30.44 103.25,32.47 v94.61,32.47
P10
  Top 0.254: 111.88,66.76 R5.15 111.88,68.8 111.88,69.3 132.71,69.3 132.96,69.05 132.96,59.14 128.14,54.32 128.14,36.54 124.07,32.47 124.07,24.09 114.42,24.09 113.66,24.85 113.66,25.36 116.2,27.9 116.2,28.41 116.45,28.66 U$1.11
P13
  Top 0.254: U$1.14 118.49,32.47 122.55,32.47 122.55,50.25 130.42,58.13 130.42,66.51 130.68,66.76 R6.15
P14  (via drill 0.61)
  Top 0.254: v91.82,65.75 91.56,66 91.56,66.76 R4.14 | v119.76,61.43 119.76,33.24 118.49,33.24 U$1.15
  Bottom 0.254: v91.82,65.75 115.44,65.75 v119.76,61.43
P15  (via drill 0.61)
  Top 0.254: v116.96,32.98 116.96,33.49 117.47,34 117.72,34 U$1.16 | v116.45,52.03 112.14,56.35 112.14,65.24 110.61,66.76 R5.14
  Bottom 0.254: v116.96,32.98 117.72,32.22 131.44,32.22 132.71,33.49 132.71,46.95 121.53,46.95 v116.45,52.03
P18
  Top 0.254: U$1.21 118.49,38.06 119.25,38.06 119.25,60.67 118.74,61.18 118.74,62.45 121.28,64.99 129.41,64.99 129.41,66.76 R6.14
P19
  Top 0.254: R4.13 90.29,68.8 90.29,69.3 94.61,69.3 98.17,72.86 98.17,78.45 101.47,78.45 101.98,77.94 101.98,71.34 105.28,71.34 107.31,69.3 107.31,66.26 107.56,66 107.56,57.62 116.96,48.22 116.96,39.59 117.72,38.82 U$1.22
P28  (via drill 0.61)
  Top 0.254: U$1.35 106.29,38.06 105.53,38.06 105.53,45.43 v106.04,45.94 105.79,46.19 105.79,54.06 100.2,54.06 99.44,53.3 99.44,20.54 99.18,20.28 R7.2
  Bottom 0.254: v106.04,45.94 104.77,47.21 103.5,47.21 IC4.6
P29  (via drill 0.61)
  Top 0.254: R6.12 126.87,66.76 125.6,65.49 117.47,65.49 v117.47,56.6 | U$1.36 106.29,37.3 105.02,37.3 105.02,52.03 103.5,53.56 100.45,53.56 100.45,46.19 101.21,45.43 IC4.5 101.21,44.41 99.94,43.14 99.94,17.23 99.18,16.47 R3.2
  Bottom 0.254: v117.47,56.6 117.47,54.32 108.07,44.92 IC4.5
P30  (via drill 0.61)
  Top 0.254: v104.01,40.09 104.52,39.59 104.52,36.28 106.29,36.28 U$1.37
  Bottom 0.254: v104.01,40.09 105.53,41.62 128.9,41.62 PROP_PLUG.4
P31  (via drill 0.61)
  Top 0.254: v107.82,38.32 107.82,35.52 107.06,35.52 U$1.38
  Bottom 0.254: v107.82,38.32 110.61,41.11 126.87,41.11 128.9,39.08 PROP_PLUG.3
PWM1  (via drill 0.61)
  Top 0.254: v110.61,24.35 110.61,28.41 110.87,28.66 U$1.4
  Bottom 0.254: v110.61,24.35 110.1,24.85 19.93,24.85 16.38,28.41 IC1.5
PWM2  (via drill 0.61)
  Top 0.254: v114.68,25.11 119.25,29.68 119.25,31.46 118.49,31.46 U$1.13
  Bottom 0.254: v114.68,25.11 114.42,25.36 27.81,25.36 24.76,28.41 24.76,32.73 23.49,32.73 22.73,33.49 IC1.10
PWM3  (via drill 0.61)
  Top 0.254: v115.69,37.3 117.72,37.3 U$1.20
  Bottom 0.254: v115.69,37.3 46.35,37.3 43.81,34.76 IC2.5
PWM6  (via drill 0.61)
  Top 0.254: v103.75,30.44 103.75,30.7 106.29,30.7 U$1.44
  Bottom 0.254: v103.75,30.44 81.66,30.44 79.88,32.22 IC3.10
RES
  Top 0.254: 124.58,23.58 114.17,23.58 113.15,24.6 113.15,28.66 U$1.7 | 124.58,23.58 124.58,26.12 RESET.P$1 125.85,27.39 125.85,32.47 128.9,35.52 PROP_PLUG.2 | 124.58,23.58 124.58,21.55 125.09,21.04 RESET.P$2
SEN_1
  Bottom 0.254: IC1.1 10.79,36.03 12.06,37.3 24.76,37.3 48.13,60.67 82.16,60.67 82.67,61.18 SEN_EN.1
SEN_2
  Route2 0.254: SEN_EN.3 48.89,27.14 31.11,27.14 IC1.15
SEN_3
  Route2 0.254: SEN_EN.5 59.05,29.68 40,29.68 IC2.1
SEN_4  (via drill 0.61)
  Top 0.254: v59.3,51.27 58.8,50.76 v58.8,31.46
  Bottom 0.254: v59.3,51.27 68.19,60.16 89.28,60.16 90.29,61.18 SEN_EN.7 | v58.8,31.46 57.02,29.68 IC2.15
SEN_5  (via drill 0.61)
  Top 0.254: v92.58,35.78 92.58,52.79 94.61,54.83 94.61,59.14 94.1,59.65 94.1,60.41 93.59,60.92 SEN_EN.9
  Bottom 0.254: v92.58,35.78 92.32,35.52 68.7,35.52 67.94,34.76 IC3.1
SEN_6  (via drill 0.61)
  Top 0.254: v97.66,35.78 97.66,59.4 96.13,60.92 SEN_EN.11 | v90.04,34.51 86.23,30.7 86.23,29.68 IC3.15
  Bottom 0.254: v97.66,35.78 96.39,34.51 v90.04,34.51
VCC3.3V2
  Top 0.254: 101.98,13.68 99.94,11.65 X1.2 | 101.98,13.68 102.23,13.93 | 101.98,13.68 101.98,39.33 104.01,41.36 104.01,51.27 103.25,52.03 IC4.8